# Altium PCB DAC8541 Mono Board PCB.PcbDoc
Units mil, origin at the board's own origin, x right, y up, seen from the top; angles counter-clockwise.
Board outline 1100 x 1100 mil, 2 copper layers (Top Layer, Bottom Layer); 9 components, 28 nets, 72 pads, 0 vias.
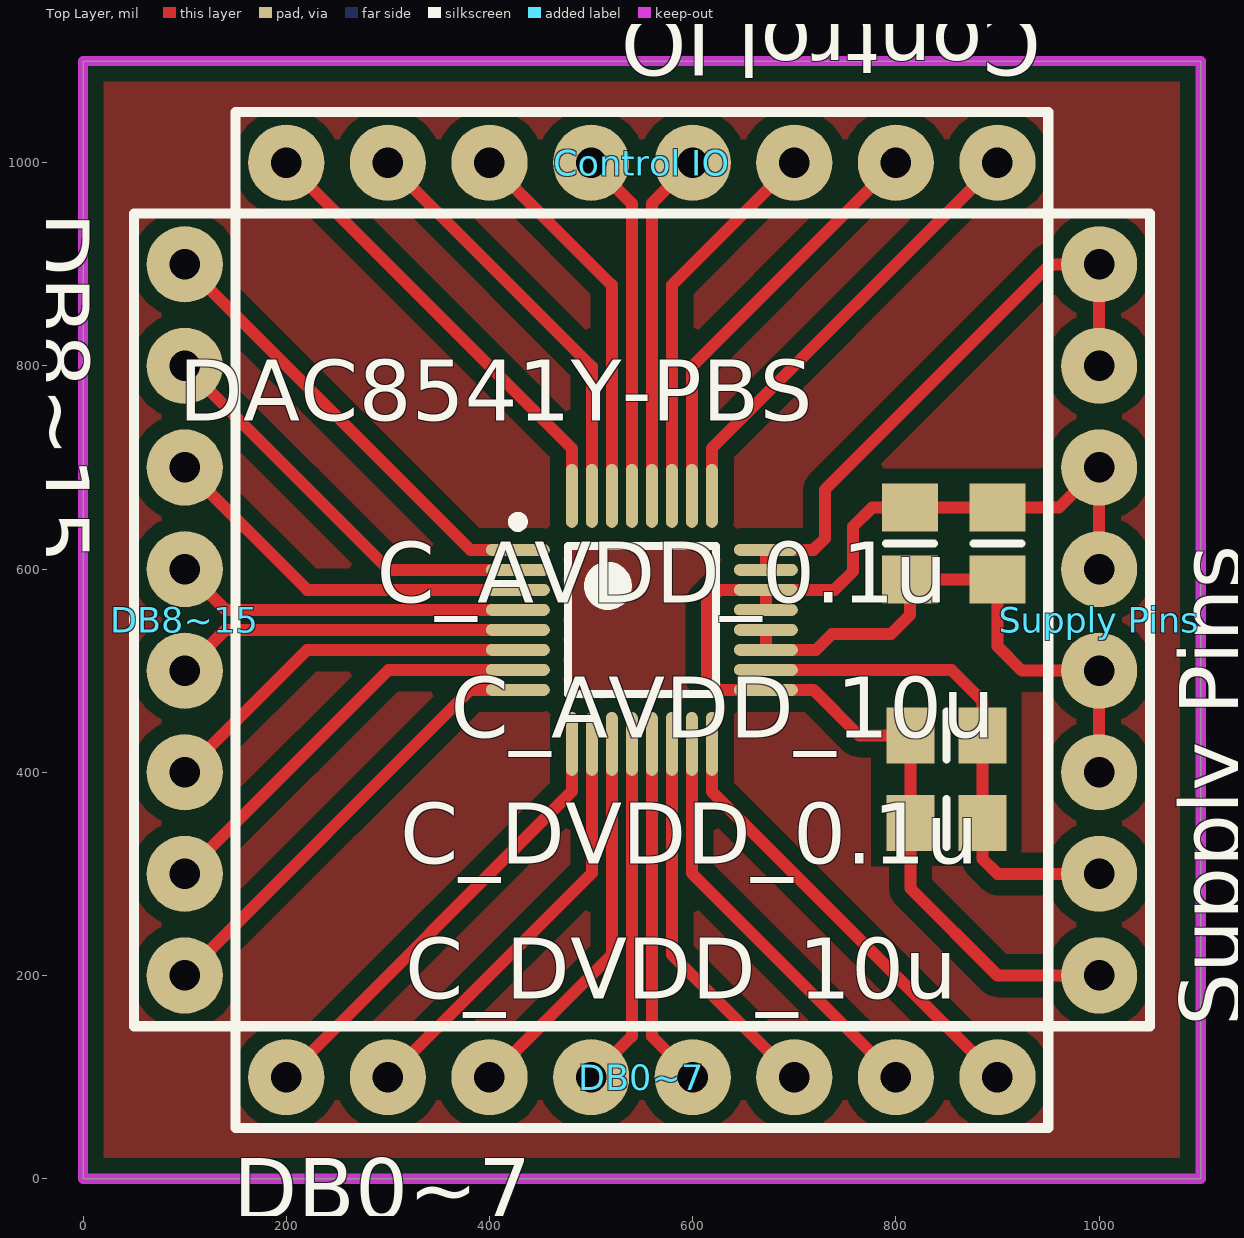
[diagram p0: Top Layer view]
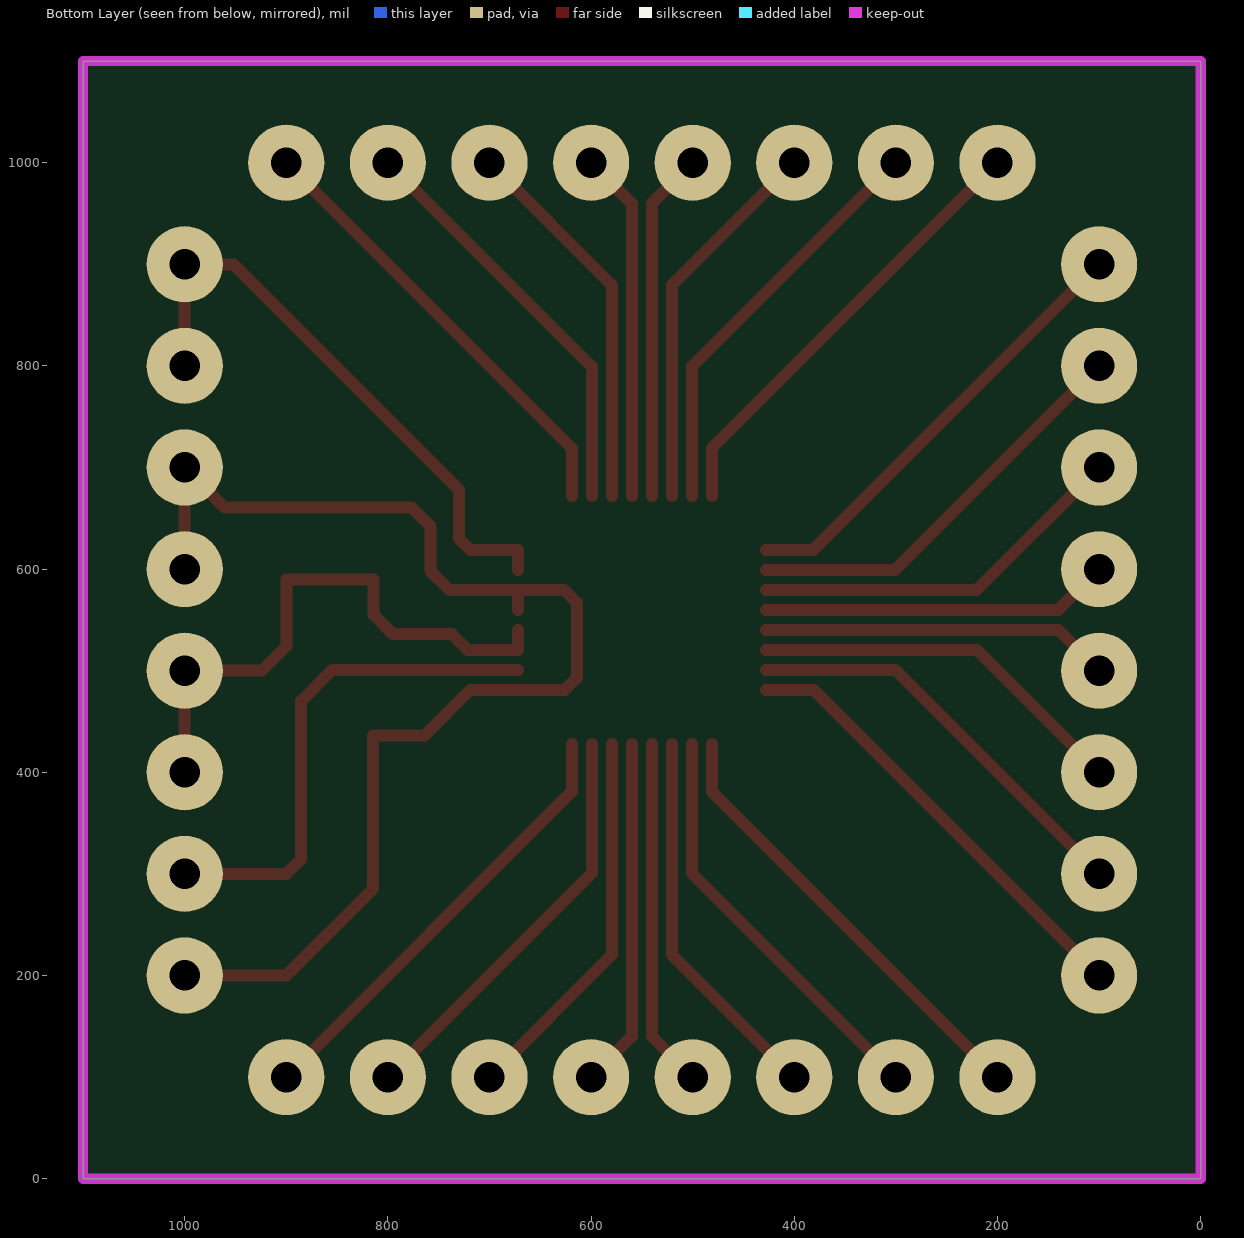
[diagram p1: Bottom Layer view, seen from below]

## Layer stack, top to bottom
Top Layer: signal copper 1.4
Dielectric: dielectric 12.6, FR-4, Dk 4.8
Bottom Layer: signal copper 1.4

## Board outline
0,0 0,1100 1100,1100 1100,0

## Design rules (kind name [scope] priority, off if disabled: settings)
Clearance [All] p1: gap=15
PolygonConnect [All] p1: connectstyle=Relief reliefconductorwidth=10 reliefentries=4 polygonreliefangle="90 Angle"
RoutingCorners [All] p1: cornerstyle=Round minsetback=100 maxsetback=100
RoutingLayers [All] p1: top layer_v5=TRUE bottom layer_v5=FALSE
RoutingVias [All] p1: holewidth=28 width=50 viastyle="Through Hole" minholewidth=28 minwidth=50 maxholewidth=28 maxwidth=50
SilkscreenOverComponentPads [All] p1: minsilkscreentomaskgap=10
SolderMaskExpansion [All] p1: expansion=4
Width [All] p1: maxlimit=11.81 minlimit=11.81 preferedwidth=11.81
25 further rules are at their usual default settings.

## Components (designator, comment, footprint, x,y, rotation, side; value= is the part's Value field where it differs from the comment)
C_AVDD_0.1u "Cap" 6-0805_N 814,625 r270 top
C_AVDD_10u "Cap" 6-0805_N 900,625 r270 top
C_DVDD_0.1u "Cap" 6-0805_N 850,436 r0 top
C_DVDD_10u "Cap" 6-0805_N 850,350 r0 top
"Control IO" "Header 8H" Header8pin 200,1000 r0 top
DAC8541Y-PBS "DAC8541Y-PBS" TSQFP50P700X700X120-32N 550,550 r0 top
DB0~7 "Header 8H" Header8pin 900,100 r180 top
DB8~15 "Header 8H" Header8pin 100,200 r90 top
"Supply Pins" "Header 8" Header8pin 1000,900 r270 top

## Footprints (in the part's own frame and the unit in brackets; to place one, negate y for a bottom-side part, rotate by r counter-clockwise, add the part's x,y. Pads: shape width x height; smd on the part's side, far side on the other; paste and mask are expansions set on the pad)
6-0805_N [mm] "Chip Resistor, Body 2.0x1.2mm, IPC Medium Density"
  rect 1.2x1.4 smd: 1(-0.9,0) 2(0.9,0)
  silkscreen extent 0,-0.6 0,0.6, body extent -1.07,-0.7 1.07,0.7, height 0.7
Header8pin [mil]
  round 75 hole 30: 1(0,0) 2(100,0) 3(200,0) 4(300,0) 5(400,0) 6(500,0) 7(600,0) 8(700,0)
  silkscreen extent -50,-50 750,50
TSQFP50P700X700X120-32N [mm] "TSQFP, 32-Leads, Body 7.1x7.1mm (max), Pitch 0.50mm, IPC Medium Density"
  oval 1.6x0.3 smd: 1(-3.1,1.75) 2(-3.1,1.25) 3(-3.1,0.75) 4(-3.1,0.25) 5(-3.1,-0.25) 6(-3.1,-0.75) 7(-3.1,-1.25) 8(-3.1,-1.75) 17(3.1,-1.75) 18(3.1,-1.25) 19(3.1,-0.75) 20(3.1,-0.25) 21(3.1,0.25) 22(3.1,0.75) 23(3.1,1.25) 24(3.1,1.75)
  oval 0.3x1.6 smd: 9(-1.75,-3.1) 10(-1.25,-3.1) 11(-0.75,-3.1) 12(-0.25,-3.1) 13(0.25,-3.1) 14(0.75,-3.1) 15(1.25,-3.1) 16(1.75,-3.1) 25(1.75,3.1) 26(1.25,3.1) 27(0.75,3.1) 28(0.25,3.1) 29(-0.25,3.1) 30(-0.75,3.1) 31(-1.25,3.1) 32(-1.75,3.1)
  silkscreen extent -3.22,-1.85 1.85,2.57, body extent -2.5,-2.5 2.5,2.5, height 1.2

## Part data
C_AVDD_0.1u C_AVDD_10u C_DVDD_0.1u C_DVDD_10u: "Capacitor"
"Control IO" DB0~7 DB8~15: "Header, 8-Pin, Right Angle"
"Supply Pins": "Header, 8-Pin"

## Nets (pads, with @x,y where several pads share a name; then routed paths per layer and width w, separated by ;. In a path a pad name is that pad's centre, name@x,y a point inside that pad or via, vN(x,y) a via of type N, cw(c..) or ccw(c..) an arc to the next point about the centre after c; other vN are vias at no path point)
AGND: "Supply Pins.3" "Supply Pins.4" "Supply Pins.8" C_AVDD_0.1u.1 C_AVDD_10u.1 C_DVDD_0.1u.1 C_DVDD_10u.1 DAC8541Y-PBS.17 DAC8541Y-PBS.21 DAC8541Y-PBS.22 | length 1256.1
  Top Layer w11.81: DAC8541Y-PBS.17 625.9,481.1 614,493 614,567 626.53,579.53 DAC8541Y-PBS.22 ; DAC8541Y-PBS.17 718.9,481.1 764,436 C_DVDD_0.1u.1 C_DVDD_10u.1 814.57,285.43 900,200 1000,200 ; DAC8541Y-PBS.21 DAC8541Y-PBS.22 ; 1000,600 1000,700 960.43,660.43 C_AVDD_10u.1 C_AVDD_0.1u.1 776.43,660.43 758,642 758,598 739.53,579.53 DAC8541Y-PBS.22
AVDD: "Supply Pins.5" "Supply Pins.6" C_AVDD_0.1u.2 C_AVDD_10u.2 DAC8541Y-PBS.19 DAC8541Y-PBS.20 | length 572
  Top Layer w11.81: DAC8541Y-PBS.20 DAC8541Y-PBS.19 721.47,520.47 737,536 795,536 814,555 C_AVDD_0.1u.2 C_AVDD_10u.2 900,524 924,500 1000,500 1000,400
DVDD: "Supply Pins.7" C_DVDD_0.1u.2 C_DVDD_10u.2 DAC8541Y-PBS.18 | length 502.2
  Top Layer w11.81: DAC8541Y-PBS.18 854.65,500.79 885.43,470 C_DVDD_0.1u.2 C_DVDD_10u.2 885.43,314.57 900,300 1000,300
"NetControl IO_1": "Control IO.1" DAC8541Y-PBS.32 | length 444.4
  Top Layer w11.81: 200,1000 481.1,718.9 DAC8541Y-PBS.32
"NetControl IO_2": "Control IO.2" DAC8541Y-PBS.31 | length 411.1
  Top Layer w11.81: 300,1000 500.79,799.21 DAC8541Y-PBS.31
"NetControl IO_3": "Control IO.3" DAC8541Y-PBS.30 | length 377.9
  Top Layer w11.81: 400,1000 520.47,879.53 DAC8541Y-PBS.30
"NetControl IO_4": "Control IO.4" DAC8541Y-PBS.29 | length 344.6
  Top Layer w11.81: 500,1000 540.16,959.84 DAC8541Y-PBS.29
"NetControl IO_5": "Control IO.5" DAC8541Y-PBS.28 | length 344.6
  Top Layer w11.81: DAC8541Y-PBS.28 559.84,959.84 600,1000
"NetControl IO_6": "Control IO.6" DAC8541Y-PBS.27 | length 377.9
  Top Layer w11.81: DAC8541Y-PBS.27 579.53,879.53 700,1000
"NetControl IO_7": "Control IO.7" DAC8541Y-PBS.26 | length 411.1
  Top Layer w11.81: DAC8541Y-PBS.26 599.21,799.21 800,1000
"NetControl IO_8": "Control IO.8" DAC8541Y-PBS.25 | length 444.4
  Top Layer w11.81: DAC8541Y-PBS.25 618.9,718.9 900,1000
NetDAC8541Y-PBS_1: DAC8541Y-PBS.1 DB8~15.8 | length 444.4
  Top Layer w11.81: DB8~15.8 381.1,618.9 DAC8541Y-PBS.1
NetDAC8541Y-PBS_2: DAC8541Y-PBS.2 DB8~15.7 | length 411.1
  Top Layer w11.81: DB8~15.7 300.79,599.21 DAC8541Y-PBS.2
NetDAC8541Y-PBS_3: DAC8541Y-PBS.3 DB8~15.6 | length 377.9
  Top Layer w11.81: DB8~15.6 220.47,579.53 DAC8541Y-PBS.3
NetDAC8541Y-PBS_4: DAC8541Y-PBS.4 DB8~15.5 | length 344.6
  Top Layer w11.81: DB8~15.5 140.16,559.84 DAC8541Y-PBS.4
NetDAC8541Y-PBS_5: DAC8541Y-PBS.5 DB8~15.4 | length 344.6
  Top Layer w11.81: DB8~15.4 140.16,540.16 DAC8541Y-PBS.5
NetDAC8541Y-PBS_6: DAC8541Y-PBS.6 DB8~15.3 | length 377.9
  Top Layer w11.81: DB8~15.3 220.47,520.47 DAC8541Y-PBS.6
NetDAC8541Y-PBS_7: DAC8541Y-PBS.7 DB8~15.2 | length 411.1
  Top Layer w11.81: DB8~15.2 300.79,500.79 DAC8541Y-PBS.7
NetDAC8541Y-PBS_8: DAC8541Y-PBS.8 DB8~15.1 | length 444.4
  Top Layer w11.81: DB8~15.1 381.1,481.1 DAC8541Y-PBS.8
NetDAC8541Y-PBS_9: DAC8541Y-PBS.9 DB0~7.8 | length 444.4
  Top Layer w11.81: DB0~7.8 481.1,381.1 DAC8541Y-PBS.9
NetDAC8541Y-PBS_10: DAC8541Y-PBS.10 DB0~7.7 | length 411.1
  Top Layer w11.81: DB0~7.7 500.79,300.79 DAC8541Y-PBS.10
NetDAC8541Y-PBS_11: DAC8541Y-PBS.11 DB0~7.6 | length 377.9
  Top Layer w11.81: DB0~7.6 520.47,220.47 DAC8541Y-PBS.11
NetDAC8541Y-PBS_12: DAC8541Y-PBS.12 DB0~7.5 | length 344.6
  Top Layer w11.81: DB0~7.5 540.16,140.16 DAC8541Y-PBS.12
NetDAC8541Y-PBS_13: DAC8541Y-PBS.13 DB0~7.4 | length 344.6
  Top Layer w11.81: DAC8541Y-PBS.13 559.84,140.16 DB0~7.4
NetDAC8541Y-PBS_14: DAC8541Y-PBS.14 DB0~7.3 | length 377.9
  Top Layer w11.81: DAC8541Y-PBS.14 579.53,220.47 DB0~7.3
NetDAC8541Y-PBS_15: DAC8541Y-PBS.15 DB0~7.2 | length 411.1
  Top Layer w11.81: DAC8541Y-PBS.15 599.21,300.79 DB0~7.2
NetDAC8541Y-PBS_16: DAC8541Y-PBS.16 DB0~7.1 | length 444.4
  Top Layer w11.81: DAC8541Y-PBS.16 618.9,381.1 DB0~7.1
VOUT: "Supply Pins.1" "Supply Pins.2" DAC8541Y-PBS.23 DAC8541Y-PBS.24 | length 592.2
  Top Layer w11.81: DAC8541Y-PBS.23 DAC8541Y-PBS.24 718.9,618.9 730,630 730,678 952,900 1000,900 1000,800

## Polygon pours and split planes (outlines as drawn)
no net on Top Layer "Keep-Out Layer-No Net" (solid, pour order 2): 0,1100 0,0 1100,0 1100,1100

## Keep-outs
Keep-Out Layer:
  the board outline again, w10